# Altium PCB LOCK.PcbDoc
Units mm, origin at the board's own origin, x right, y up, seen from the top; angles counter-clockwise.
Board outline 115 x 40 mm, 2 copper layers (Top Layer, Bottom Layer); 90 components, 73 nets, 329 pads, 0 vias.
Unrouted connection lines stored in the file: 202.
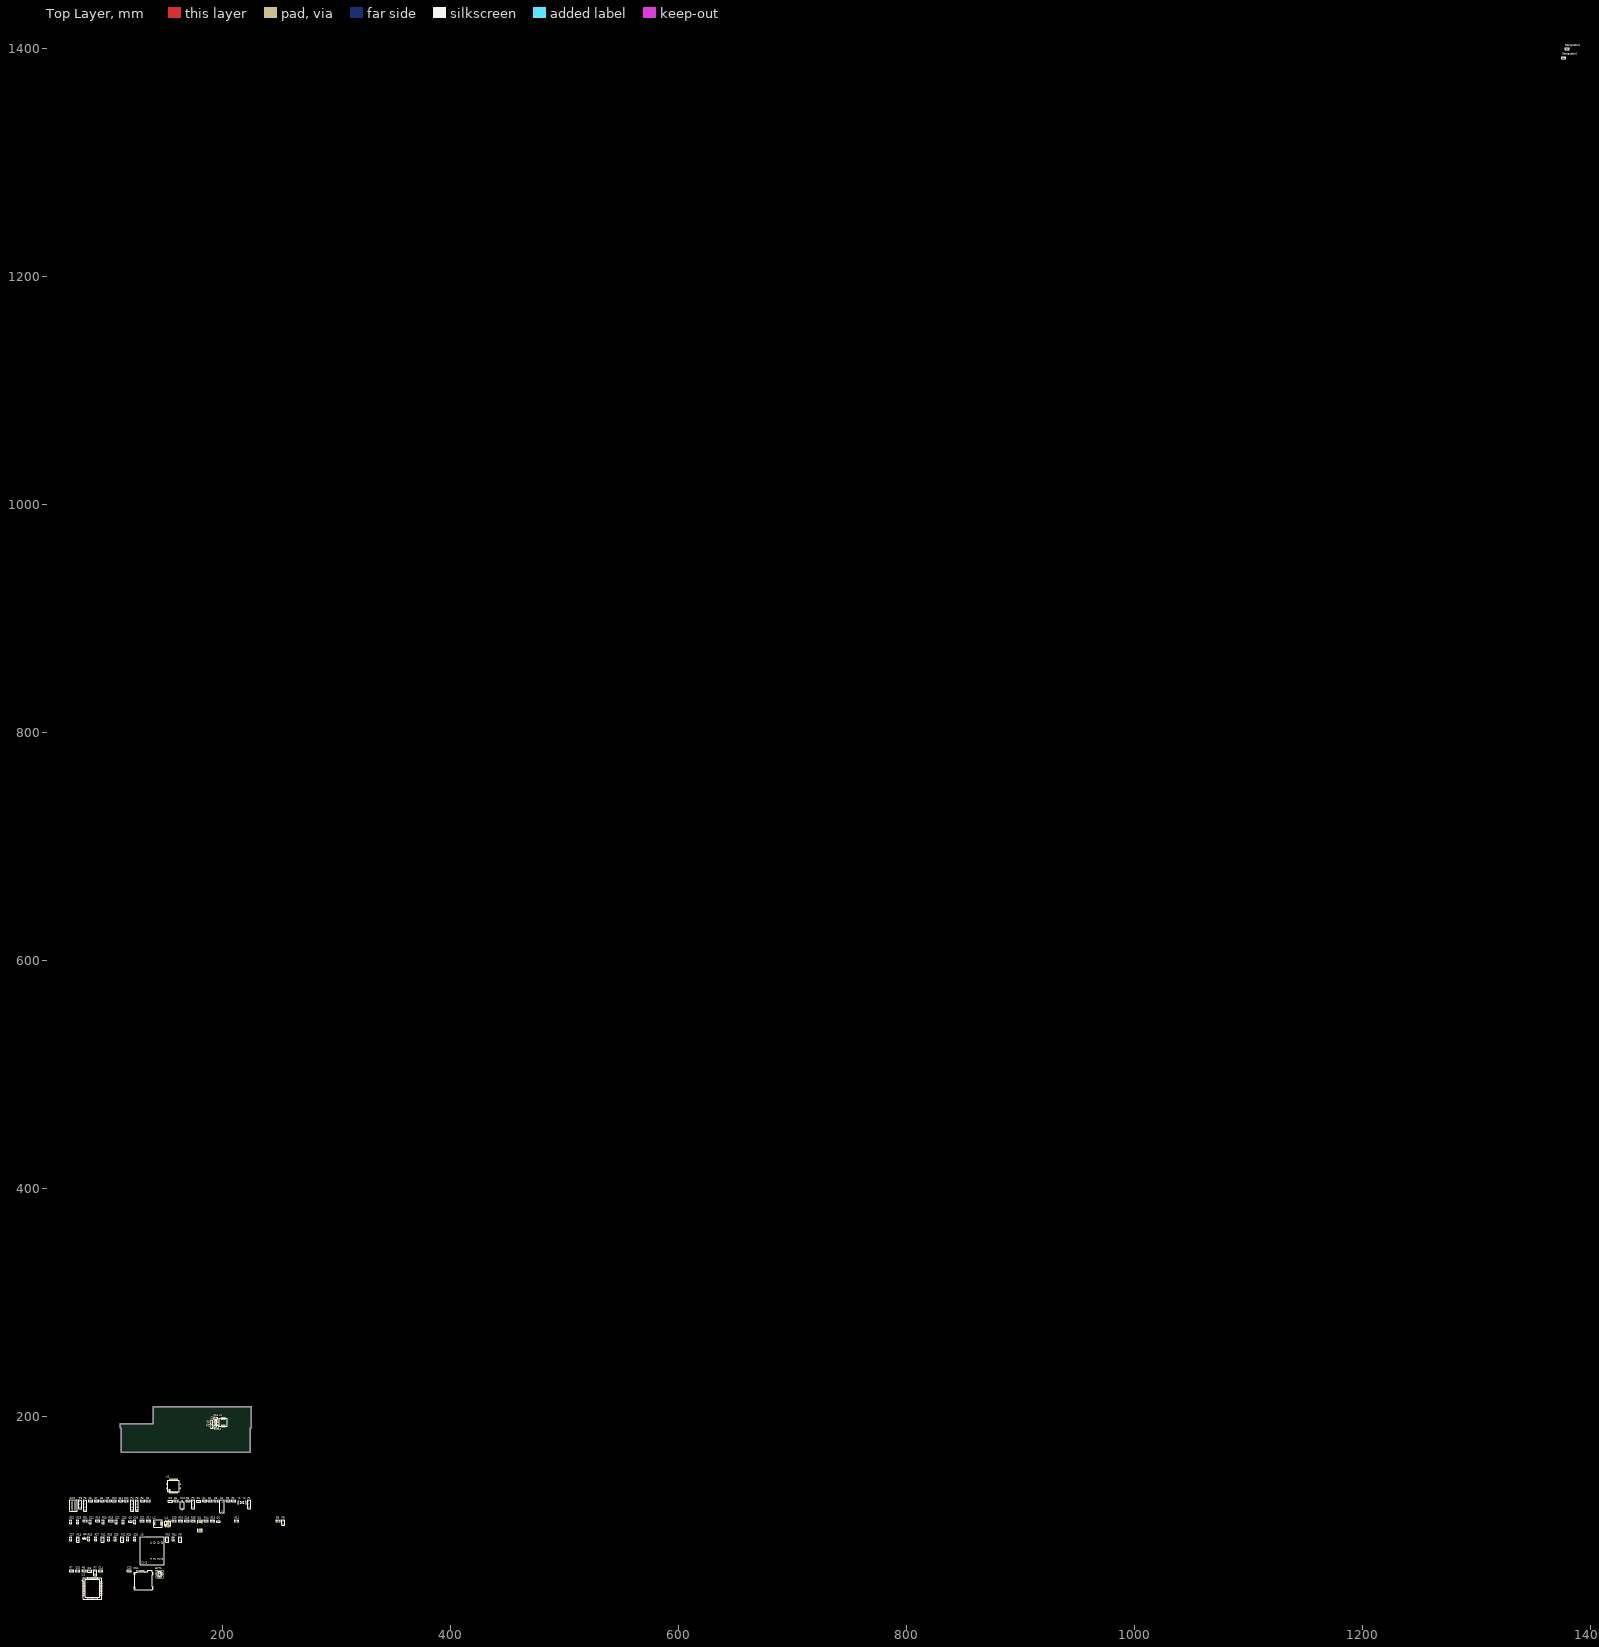
[diagram p0: Top Layer view]
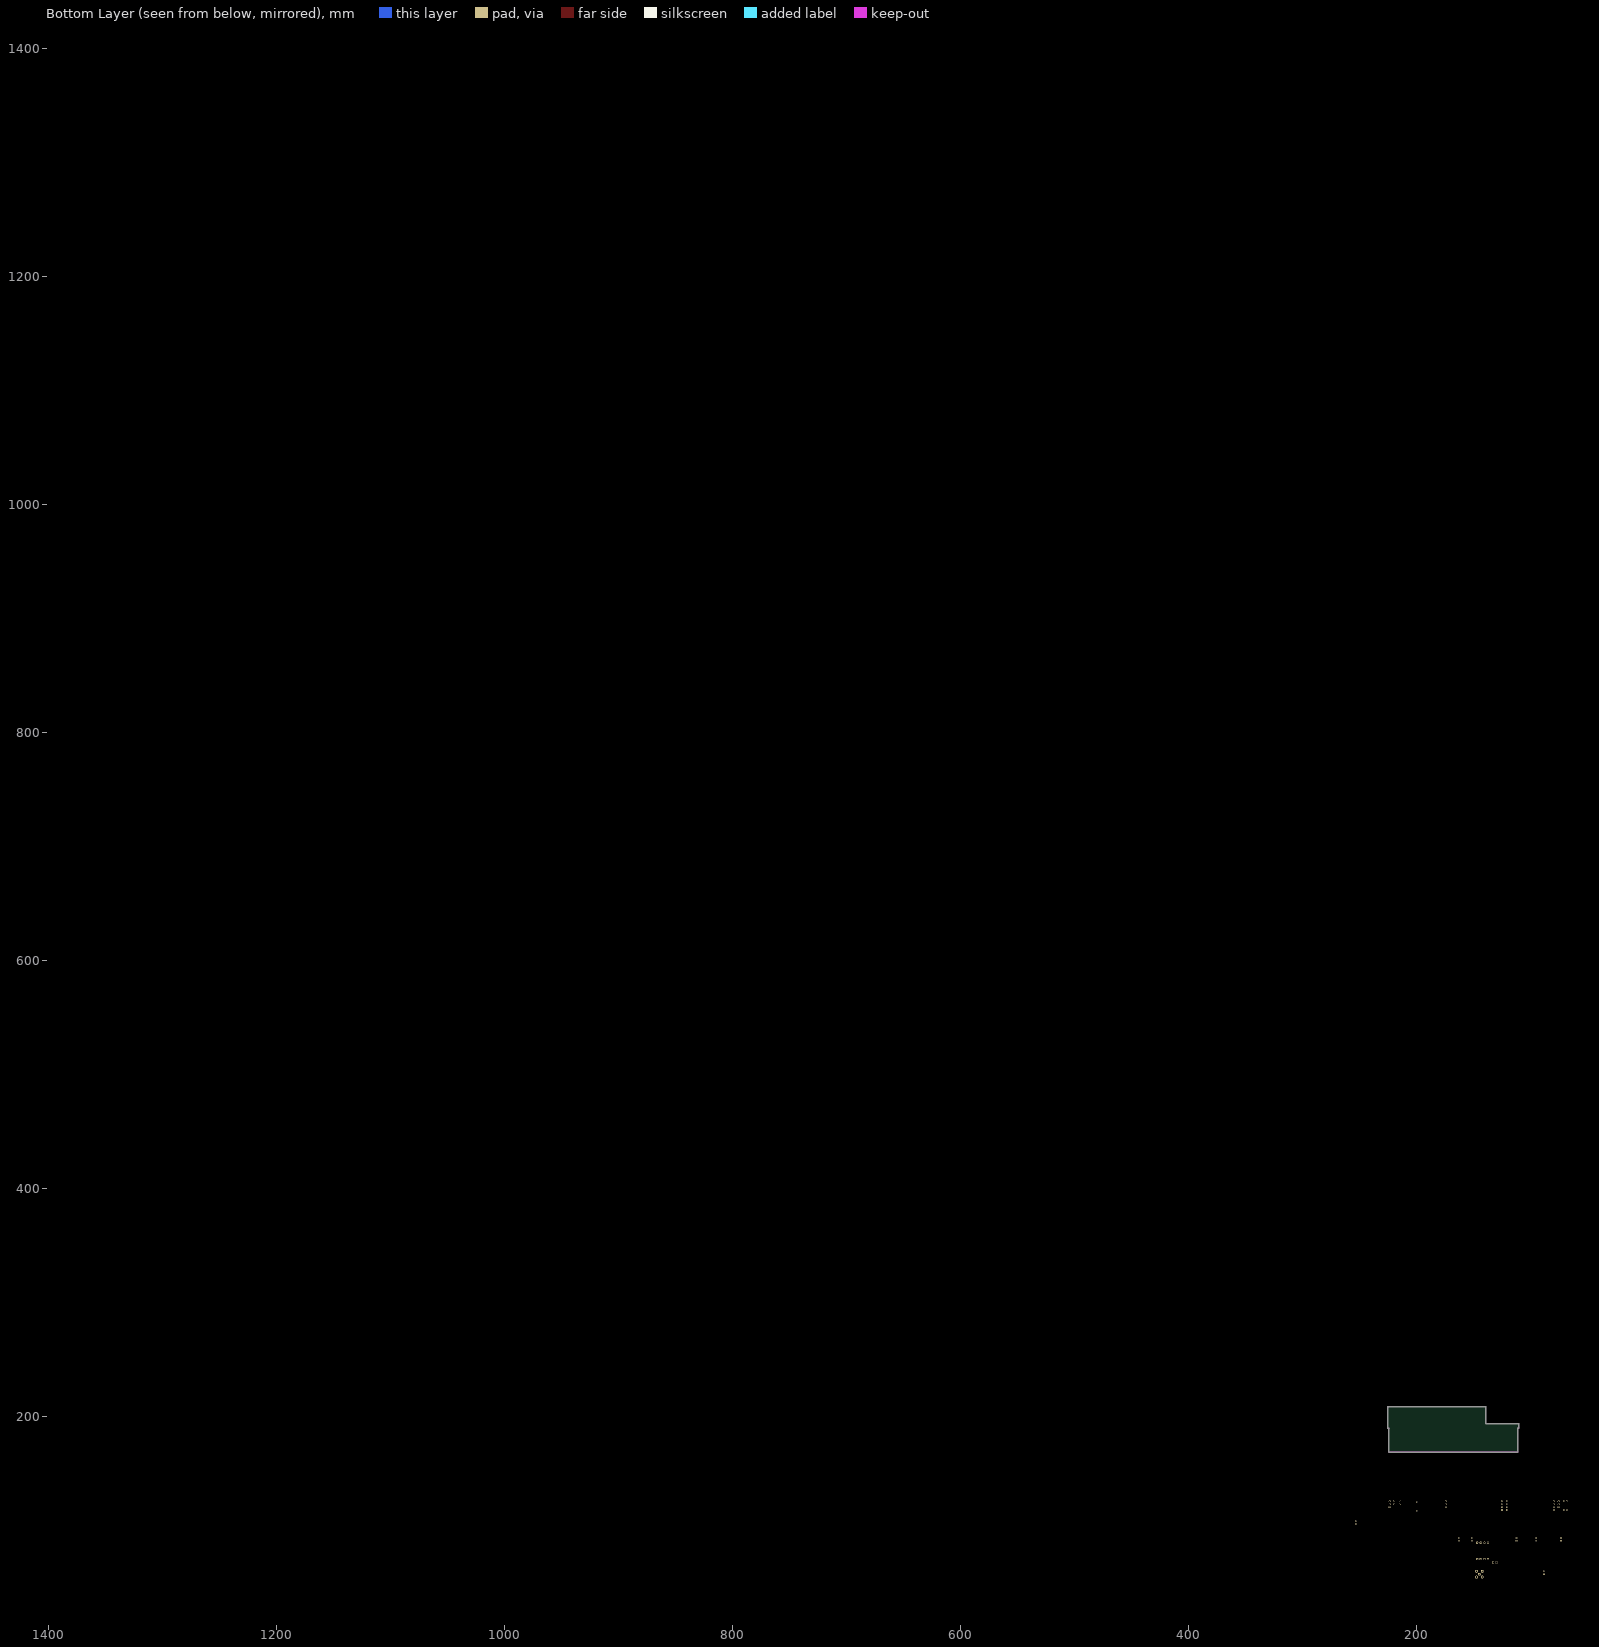
[diagram p1: Bottom Layer view, seen from below]

## Layer stack, top to bottom
Top Solder: solder mask 0.0102, Solder Resist, Dk 3.5
Top Layer: signal copper 0.0356
Dielectric 1: dielectric 0.32, FR-4, Dk 4.8
Bottom Layer: signal copper 0.0356
Bottom Solder: solder mask 0.0102, Solder Resist, Dk 3.5

## Board outline
111.191,189.347 ccw(c110.891,189.347) 110.891,189.647 110.491,189.647 cw(c110.491,189.947) 110.191,189.947 110.191,193.347 cw(c110.491,193.347) 110.491,193.647 138.891,193.647 ccw(c138.891,193.947) 139.191,193.947 139.191,208.347 cw(c139.491,208.347) 139.491,208.647 224.891,208.647 cw(c224.891,208.347) 225.191,208.347 225.191,189.947 cw(c224.891,189.947) 224.891,189.647 224.491,189.647 ccw(c224.491,189.347) 224.191,189.347 224.191,168.947 cw(c223.891,168.947) 223.891,168.647 111.491,168.647 cw(c111.491,168.947) 111.191,168.947

## Design rules (kind name [scope] priority, off if disabled: settings)
Clearance [All] p1: gap=0.2 ignorepadtopadclearanceinfootprint=FALSE
PolygonConnect [All] p1: connectstyle=Relief reliefconductorwidth=0.254 reliefentries=4 polygonreliefangle="90 Angle" airgapwidth=0.254
RoutingVias [All] p1: holewidth=0.711 width=1.27 viastyle="Through Hole" minholewidth=0.711 minwidth=1.27 maxholewidth=0.711 maxwidth=1.27
SilkToSilkClearance [All] p1: silktosilkclearance=0
SolderMaskExpansion [All] p1: expansion=0.102
Width [All] p1: maxlimit=0.254 minlimit=0.254 preferedwidth=0.254
29 further rules are at their usual default settings.

## Classes and differential pairs
component class GPRS: ANT1 C13 C14 C15 CN1 D3 P7 R6 R7 U2
component class U_DK_MOTO: C25 C26 C27 P9 P10 P11 P12 P13 Q3 R24 R25 R26 R27 R28 U5
component class U_DK_POWER: C16 C17 C18 C19 C20 C21 C22 C23 C24 D4 L1 L2 P8 Q1 Q2 R8 R9 R10 R11 R12 R13 R14 R15 R16 R17 R18 R19 R20 R21 R22 R23 U3 U4
component class U_DK_STM32L151: C1 C2 C3 C4 C5 C6 C7 C8 C9 C10 C11 C12 D1 D2 P1 P2 P3 P4 P5 P6 R1 R2 R3 R4 R5 SW1 SW2 U1 Y1 Y2

## Components (designator, comment, footprint, x,y, rotation, side; value= is the part's Value field where it differs from the comment)
ANT1 "SMB" SMB_V-RJ45 144.78,61.595 r0 top
C1 "Cap" 0603 -1016.508,-1071.372 r0 top value=22pF
C2 "Cap" 0603 -1011.428,-1071.372 r0 top value=22pF
C3 "Cap" 0603 -1006.348,-1071.372 r0 top value=10pF
C4 "Cap" RAD-0.3 199.644,121.031 r90 top value=10pF
C5 "Cap" 0603 -1041.4,-1071.372 r0 top value=0.1uF
C6 "Cap" 0603 -1116.33,-1071.372 r0 top value=100nF
C7 "Cap" 0603 -1111.25,-1071.372 r0 top value=100nF
C8 "Cap" 0603 -1106.17,-1071.372 r0 top value=100nF
C9 "Cap" 0603 -1101.09,-1071.372 r0 top value=100nF
C10 "Cap" 0603 -1096.01,-1071.372 r0 top value=10uF
C11 "Cap" 0603 -1090.295,-1071.372 r0 top value=100nF
C12 "NC" 0603 -1085.215,-1071.372 r0 top value=10uF
C13 "Cap2" 0603 -1082.548,-1132.713 r0 top value=100uF/6.6V
C14 "Cap" 0603 -1107.821,-1132.713 r0 top value=10uF
C15 "Cap" 0603 -1127.887,-1132.713 r0 top value=100nF
C16 "Cap" 0603 -1006.577,-998.982 r0 top value=4.7uF
C17 "Cap" 0603 1387.856,-1005.307 r90 top value=4.7uF
C18 "Cap" 0603 -1032.002,-1088.644 r0 top value=2.2uF
C19 "Cap" 0603 -1043.178,-1088.644 r0 top value=0.1uF
C20 "Cap" 0603 1320.292,-1093.216 r90 top value=10uF
C21 "Cap" 0603 -1071.118,-1088.644 r0 top value=10uF
C22 "Cap" 0603 1304.163,-1093.216 r90 top value=22uF
C23 "Cap" 0603 1310.005,-1093.216 r90 top value=22uF
C24 "Cap" 0603 1281.176,-1093.216 r90 top value=2.7nF
C25 "Cap" 0603 1320.038,-1108.075 r90 top value=0.1uF
C26 "Cap" 0603 1303.274,-1108.075 r90 top value=0.1uF
C27 "Cap" 0603 1264.158,-1108.075 r90 top value=0.1uF
CN1 "SIM_BLOCK" SIM_BLOCK 124.46,64.643 r0 top
D1 "LED0" LED0603 178.435,125.73 r0 top
D2 "LED0" LED0603 153.543,125.73 r0 top
D3 "LED GREEN" LED0603 82.804,64.389 r0 top
D4 "Diode" SMC 180.34,104.013 r90 top
Designator1 "Comment" 0603 178.689,202.438 r0 top
Designator2 "Comment" 0603 175.895,194.818 r0 top
L1 "Inductor" 0630 200.533,191.643 r90 top value=22uH
L2 "Inductor" 0630 140.081,106.045 r0 top value=4.7uH
P1 "BOOT0" HDR1X3 223.52,120.396 r90 top
P2 "BOOT1" HDR1X3 174.371,120.396 r90 top
P3 "SWD" HDR1X4 124.968,117.856 r90 top
P4 "UART1" HDR1X4 120.65,117.856 r90 top
P5 "UART3" HDR1X4 79.629,117.856 r90 top
P6 "Header 3" HDR1X3 75.311,120.396 r90 top
P7 "Header 2" HDR1X2 88.138,61.595 r90 top
P8 "BATT" HDR1X2 253.238,105.664 r90 top
P9 "MOTOR" HDR1X2 162.941,90.805 r90 top
P10 "L_OFF" HDR1X2 151.511,90.805 r90 top
P11 "L_ON" HDR1X2 112.141,90.805 r90 top
P12 "BELL" HDR1X2 94.869,90.805 r90 top
P13 "BUTTON" HDR1X2 73.152,90.805 r90 top
Q1 "MOSFET-N" sot-23 196.469,107.95 r0 top
Q2 "MOSFET-P" sot-23 119.126,107.95 r0 top
Q3 "NPN" SOT-23 78.994,93.091 r0 top
R1 "Res2" 0603 -990.854,-1071.372 r0 top value=10K
R2 "Res2" 0603 -995.934,-1071.372 r0 top value=1K
R3 "Res2" 0603 -1030.986,-1071.372 r0 top value=1K
R4 "Res2" 0603 -1065.911,-1071.372 r0 top value=3K
R5 "Res2" 0603 -1070.991,-1071.372 r0 top value=100R
R6 "Res2" 0603 -1122.299,-1132.713 r0 top value=1K
R7 "NC" 0603 -1132.967,-1132.713 r0 top value=0
R8 "Res2" 0603 -951.992,-1088.644 r0 top value="30K %1"
R9 "Res2" 0603 -1003.681,1391.895 r270 top value=300K
R10 "Res2" 0603 -1001.522,1391.895 r270 top value=100K
R11 "Res2" 0603 -988.314,-1088.644 r0 top value="10K %1"
R12 "Res2" 0603 -1006.602,1392.149 r270 top value=100K
R13 "Res2" 0603 -1009.523,-1088.644 r0 top value=1K
R14 "Res2" 0603 -1015.238,-1088.644 r0 top value=10K
R15 "NC" 0603 -1026.414,-1088.644 r0 top value=0
R16 "Res2" 0603 -1037.59,-1088.644 r0 top value=100K
R17 "NC" 0603 -1065.657,-1088.644 r0 top value=0
R18 "Res2" 0603 -1098.677,-1088.644 r0 top value="91K 1%"
R19 "Res2" 0603 -1110.107,-1088.644 r0 top value=10K
R20 "Res2" 0603 1292.733,-1093.216 r90 top value=137K
R21 "Res2" 0603 -1121.283,-1088.644 r0 top value=0
R22 "Res2" 0603 1264.158,-1093.216 r90 top value=13K
R23 "Res2" 0603 1270,-1093.216 r90 top value="24K 1%"
R24 "Res2" 0603 1353.947,-1108.075 r90 top value=10K
R25 "Res2" 0603 1314.196,-1108.075 r90 top value=10K
R26 "Res2" 0603 1297.432,-1108.075 r90 top value=0
R27 "Res2" 0603 1285.875,-1108.075 r90 top value=1K
R28 "Res2" 0603 1280.033,-1108.075 r90 top value=10K
SW1 "SW-PB" 3*6*4.3 164.592,122.174 r90 top
SW2 "SW DIP-2" SW-2*4 69.342,121.666 r0 top
U1 "STM32L151RCT6" LQFP64 156.984,138.973 r0 top
U2 "GU906" HFY_QFN_42_DTU 77.855,58.571 r0 top
U3 "TPS62120" TPS62120 192.833,195.92 r270 top
U4 "RT7272B" RT7272B 149.987,103.378 r0 top
U5 "MOTO" moto 148.717,69.85 r90 top
Y1 "8M" R38 214.757,124.46 r0 top
Y2 "32.768M" R38 219.329,124.46 r0 top

## Footprints (in the part's own frame and the unit in brackets; to place one, negate y for a bottom-side part, rotate by r counter-clockwise, add the part's x,y. Pads: shape width x height; smd on the part's side, far side on the other; paste and mask are expansions set on the pad)
3*6*4.3 [mm]
  rect 1.7x1.4 smd: 1(-3.65,0) 2(3.65,0)
  silkscreen extent -3.17,-1.91 3.17,1.91
0603 [mil]
  rect 38x30 smd: 1(47244,47135) 2(47306,47135)
  silkscreen extent 47205,47100 47345,47170
0630 [mm]
  rect 2.5x3.7 smd: 1(0,0) 2(6.5,0)
  silkscreen extent -0.41,-3.45 6.88,3.45
HDR1X2 [mm] "Connector; Header; 2 Position"
  rect 1.5x1.5 hole 0.9: 1(0,0)
  round 1.5 hole 0.9: 2(2.54,0)
  silkscreen extent -1.27,-1.27 3.81,1.27
HDR1X3 [mm] "Connector; Header; 3 Position"
  rect 1.5x1.5 hole 0.9: 1(0,0)
  round 1.5 hole 0.9: 2(2.54,0) 3(5.08,0)
  silkscreen extent -1.27,-1.27 6.35,1.27
HDR1X4 [mm] "Connector; Header; 4 Position"
  rect 1.5x1.5 hole 0.9: 1(0,0)
  round 1.5 hole 0.9: 2(2.54,0) 3(5.08,0) 4(7.62,0)
  silkscreen extent -1.27,-1.27 8.89,1.27
HFY_QFN_42_DTU [mm]
  oval 2x0.7 smd: 1(0.25,-3.459)
  rect 2x0.7 smd: 2(0.25,-4.559) 3(0.25,-5.659) 4(0.25,-6.759) 5(0.25,-7.859) 6(0.25,-8.959) 7(0.25,-10.059) 8(0.25,-11.159) 9(0.25,-12.259) 10(0.25,-13.359) 11(0.25,-14.459) 12(0.25,-15.559) 22(15.75,-15.559) 23(15.75,-14.459) 24(15.75,-13.359) 25(15.75,-12.259) 26(15.75,-11.159) 27(15.75,-10.059) 28(15.75,-8.959) 29(15.75,-7.859) 30(15.75,-6.759) 31(15.75,-5.659) 32(15.75,-4.559) 33(15.75,-3.459)
  rect 0.7x2 smd: 13(3.612,-18.75) 14(4.712,-18.75) 15(5.812,-18.75) 16(6.912,-18.75) 17(8.012,-18.75) 18(9.112,-18.75) 19(10.212,-18.75) 20(11.312,-18.75) 21(12.412,-18.75) 34(12.412,-0.25) 35(11.312,-0.25) 36(10.212,-0.25) 37(9.112,-0.25) 38(8.012,-0.25) 39(6.912,-0.25) 40(5.812,-0.25) 41(4.712,-0.25) 42(3.612,-0.25)
  silkscreen extent -1.42,-19.01 15.99,0
LED0603 [mil]
  rect 38x30 smd: 1(0,0) 2(62,0)
  silkscreen extent -39,-35 101,35
LQFP64 [mm]
  rect 0.3x1.4 smd: 1(-3.75,-5.75) 2(-3.25,-5.75) 3(-2.75,-5.75) 4(-2.25,-5.75) 5(-1.75,-5.75) 6(-1.25,-5.75) 7(-0.75,-5.75) 8(-0.25,-5.75) 9(0.25,-5.75) 10(0.75,-5.75) 11(1.25,-5.75) 12(1.75,-5.75) 13(2.25,-5.75) 14(2.75,-5.75) 15(3.25,-5.75) 16(3.75,-5.75) 33(3.75,5.75) 34(3.25,5.75) 35(2.75,5.75) 36(2.25,5.75) 37(1.75,5.75) 38(1.25,5.75) 39(0.75,5.75) 40(0.25,5.75) 41(-0.25,5.75) 42(-0.75,5.75) 43(-1.25,5.75) 44(-1.75,5.75) 45(-2.25,5.75) 46(-2.75,5.75) 47(-3.25,5.75) 48(-3.75,5.75)
  rect 1.4x0.3 smd: 17(5.75,-3.75) 18(5.75,-3.25) 19(5.75,-2.75) 20(5.75,-2.25) 21(5.75,-1.75) 22(5.75,-1.25) 23(5.75,-0.75) 24(5.75,-0.25) 25(5.75,0.25) 26(5.75,0.75) 27(5.75,1.25) 28(5.75,1.75) 29(5.75,2.25) 30(5.75,2.75) 31(5.75,3.25) 32(5.75,3.75) 49(-5.75,3.75) 50(-5.75,3.25) 51(-5.75,2.75) 52(-5.75,2.25) 53(-5.75,1.75) 54(-5.75,1.25) 55(-5.75,0.75) 56(-5.75,0.25) 57(-5.75,-0.25) 58(-5.75,-0.75) 59(-5.75,-1.25) 60(-5.75,-1.75) 61(-5.75,-2.25) 62(-5.75,-2.75) 63(-5.75,-3.25) 64(-5.75,-3.75)
  silkscreen extent -5.21,-5.21 5.21,5.21
moto [mm]
  round 2 hole 1.4: 1(2,19) 2(5,11.5) 3(5,8.5) 4(5,5) 5(5,2) 6(19.3,2) 7(19.3,5) 8(19.3,8.5) 9(19.3,11.5) 10(2,16)
  silkscreen extent 0,0 24.7,21
R38 [mm] "Crystal, Thru-Hole; 2 Leads; Body 3.1 x 8.2 mm (Dia.xH)"
  round 1.3 hole 0.7: 1(0,1.55) 2(0,-1.55)
  silkscreen extent -1.55,-1.19 1.55,1.17
RAD-0.3 [mm] "Radial Cap, Thru-Hole; 2 Leads; 0.3 in Pin Spacing"
  round 1.2 hole 0.7: 1(-3.81,0) 2(3.81,0)
  silkscreen extent -5.71,-1.91 5.71,1.91
RT7272B [mm]
  rect 0.5x1.4 smd: 1(0,0) 2(1.27,0) 3(2.54,0) 4(3.81,0) 5(3.81,5.3) 6(2.54,5.3) 7(1.27,5.3) 8(0,5.304)
  rect 2.7x2.5 smd: 9(1.905,2.65)
  silkscreen extent -0.64,0.74 4.44,4.55
SIM_BLOCK [mm]
  rect 1x1.35 smd: C1(1.27,0) C2(3.81,0) C3(6.35,0) C5(0,0) C6(2.54,0) C7(5.08,0)
  rect 1.6x2.65 smd: C4(-1.575,-2.413) C8(-1.575,-15.113) C9(14.249,-15.113) C10(14.249,-2.413)
  silkscreen extent -1.79,-16.87 14.39,0.41
SMB_V-RJ45 [mm] "Connector; SMB Straight"
  round 2.5 hole 1.5: 1(0,0) 2(-2.5,-2.5) 2(-2.5,2.5) 2(2.5,-2.5) 2(2.5,2.5)
  silkscreen extent -3.15,-3.15 3.15,3.15
SMC [mm] "DO-214-AB/SMC; 2 C-Bend Leads; Body 7.9 x 5.9 mm, inc. leads (LxW)"
  rect 2.4x3.3 smd: 1(-3.475,0) 2(3.475,0)
  silkscreen extent -5.07,-2.05 5.43,2.05
sot-23 [mm]
  rect 0.9x0.9 smd: 1(-0.95,-1.01) 2(0.95,-1.01) 3(0,1.01)
  silkscreen extent -1.52,-0.64 1.52,0.64
SOT-23 [mm]
  rect 0.9x0.9 smd: 1(-0.95,-1.01) 2(0.95,-1.01) 3(0,1.01)
  silkscreen extent -1.52,-0.64 1.52,0.64
SW-2*4 [mm]
  round 1.5 hole 1: 1(-1.27,-3.81) 2(1.27,-3.81) 3(1.27,3.81) 4(-1.27,3.81)
  silkscreen extent -3.3,-4.95 3.3,5.08
TPS62120 [mm]
  rect 0.45x1.4 smd: 1(0,0) 2(0.65,0) 3(1.3,0) 4(1.95,0) 5(1.95,2.7) 6(1.3,2.7) 7(0.65,2.7) 8(0,2.7)
  rect 2x0.9 smd: 9(0.975,1.35)
  silkscreen extent -0.55,0.76 2.5,2.03

## Part data
ANT1: "SMB Straight Connector", LatestRevisionDate=17-Jul-2002, LatestRevisionNote="Re-released for DXP Platform.", Publisher="Altium Limited"
C1 C2 C3 C4 C5 C6 C7 C8 C9 C10 C11 C13 C14 C15 C16 C17 C18 C19 C20 C21 C22 C23 C24 C25 C26 C27: "Capacitor", Publisher="Altium Limited"
  C1 C2 C3 C4 C5 C6 C7 C8 C9 C10 C11 C14 C15 C16 C17 C18 C19 C20 C21 C22 C23 C24 C25 C26 C27: LatestRevisionDate=17-Jul-2002, LatestRevisionNote="Re-released for DXP Platform.", PackageDescription="Radial Cap, Thru-Hole; 2 Leads; 0.3 in Pin Spacing", PackageReference=RAD-0.3, Published=8-Jun-2000
  C13: PackageDescription="Capacitor; 2 Leads", PackageReference=CAPR5-4X5, Published=23-Sep-2002
C12: library part Cap, "Capacitor", LatestRevisionDate=17-Jul-2002, LatestRevisionNote="Re-released for DXP Platform.", PackageDescription="Radial Cap, Thru-Hole; 2 Leads; 0.3 in Pin Spacing", PackageReference=RAD-0.3, Published=8-Jun-2000, Publisher="Altium Limited"
CN1: library part SIM_BLOCK_2
D1 D2: "Typical INFRARED GaAs LED", LatestRevisionDate=08-Jul-2005, LatestRevisionNote="Mech Layer 1 removed.", PackageDescription="LED; 2 Leads", PackageReference=LED-0, Published=8-Jun-2000, Publisher="Altium Limited"
D3: library part LED2, "Typical RED, GREEN, YELLOW, AMBER GaAs LED", LatestRevisionDate=17-Jul-2002, LatestRevisionNote="Re-released for DXP Platform.", PackageDescription="SM LED; 2 Flat Leads", PackageReference=3.2X1.6X1.1, PackageVersion=Feb-2002, Published=8-Jun-2000, Publisher="Altium Limited"
D4: "Default Diode", Code_JEDEC=DO-214-AB, LatestRevisionDate=17-Jul-2002, LatestRevisionNote="Re-released for DXP Platform.", PackageDescription="DO-214-AB/SMC; 2 C-Bend Leads; Body 7.9 x 5.9 mm, inc. leads (LxW)", PackageReference=SMC, PackageVersion=Sep-1996, Published=8-Jun-2000, Publisher="Altium Limited"
P1 P2: library part "Header 3", "Header, 3-Pin", LatestRevisionDate=17-Jul-2002, LatestRevisionNote="Re-released for DXP Platform.", Publisher="Altium Limited"
P3 P4 P5: library part "Header 4", "Header, 4-Pin", LatestRevisionDate=17-Jul-2002, LatestRevisionNote="Re-released for DXP Platform.", Publisher="Altium Limited"
P6: "Header, 3-Pin", LatestRevisionDate=17-Jul-2002, LatestRevisionNote="Re-released for DXP Platform.", Publisher="Altium Limited"
P7: "Header, 2-Pin", LatestRevisionDate=17-Jul-2002, LatestRevisionNote="Re-released for DXP Platform.", Publisher="Altium Limited"
P8 P9 P10 P11 P12 P13: library part "Header 2", "Header, 2-Pin", LatestRevisionDate=17-Jul-2002, LatestRevisionNote="Re-released for DXP Platform.", Publisher="Altium Limited"
Q1: library part NMOS-2, "N-Channel Power MOSFET", ComponentLink1Description="Manufacturer Link", ComponentLink1URL=http://www.irf.com/, DatasheetVersion=PD-9.814, LatestRevisionDate=17-Jul-2002, LatestRevisionNote="Re-released for DXP Platform.", Note="Pin 2 is electrically connected to pin 4.", PackageDescription="TO, Thru-Hole, Vertical, Heatsink Mounted; 3 In-Line Leads; Pitch 2.54 mm", PackageReference=TO-220AB, PackageVersion=Feb-1997, Published=8-Jun-2000, Publisher="Altium Limited"
Q2: library part PMOS-2, "P-Channel Power MOSFET", ComponentLink1Description="Manufacturer Link", ComponentLink1URL=http://www.irf.com/, DatasheetVersion=PD-9.390D, LatestRevisionDate=17-Jul-2002, LatestRevisionNote="Re-released for DXP Platform.", Note="Pin 4 not drawn and electrically connected to Pin 2.", PackageDescription="TO, Thru-Hole, Vertical, Heatsink Mounted; 3 In-Line Leads; Pitch 2.54 mm", PackageReference=TO-220AB, PackageVersion=Feb-1997, Published=8-Jun-2000, Publisher="Altium Limited"
Q3: "NPN Bipolar Transistor", Code_JEDEC=TO-226-AA, LatestRevisionDate=17-Jul-2002, LatestRevisionNote="Re-released for DXP Platform.", PackageDescription="TO, Flat Index; 3 In-Line, Axial Leads; Body Dia. 4.8mm; Leads 0.55 x 0.51 mm (max)", PackageReference=TO-226-AA, Published=8-Jun-2000, Publisher="Altium Limited"
R1 R2 R3 R4 R5 R6 R8 R9 R10 R11 R12 R13 R14 R16 R18 R19 R20 R21 R22 R23 R24 R25 R26 R27 R28: "Resistor", LatestRevisionDate=17-Jul-2002, LatestRevisionNote="Re-released for DXP Platform.", PackageDescription="Axial Device, Thru-Hole; 2 Leads; 0.4 in Pin Spacing", PackageReference=AXIAL-0.4, Published=8-Jun-2000, Publisher="Altium Limited"
R7 R15 R17: library part Res2, "Resistor", LatestRevisionDate=17-Jul-2002, LatestRevisionNote="Re-released for DXP Platform.", PackageDescription="Axial Device, Thru-Hole; 2 Leads; 0.4 in Pin Spacing", PackageReference=AXIAL-0.4, Published=8-Jun-2000, Publisher="Altium Limited"
SW1: "Switch", LatestRevisionDate=17-Jul-2002, LatestRevisionNote="Re-released for DXP Platform.", PackageDescription="Switch; 2 Leads", PackageReference=SPST-2, Published=24-Mar-1999, Publisher="Altium Limited"
SW2: "DIP Switch, 2 Position, SPST", LatestRevisionDate=17-Jul-2002, LatestRevisionNote="Re-released for DXP Platform.", PackageReference=DIP-4, Published=24-Mar-1999, Publisher="Altium Limited"
U1: "ARM Cortex-M3 32-bit MCU, 256 KB Flash, 32 KB Internal RAM, 51 I/Os, 64-pin LQFP, -40 to 85 degC, Tray", I/Os (High Current)=51, Manufacturer=STMicroelectronics, Operating Frequency(F) (Processor speed) (MHz)=32, Supply Voltage(Vcc) min (V)=1.65, ComponentLink1Description="Manufacturer URL", ComponentLink1URL=http://www.st.com/web/en/home.html, ComponentLink2Description=Datasheet, ComponentLink2URL=http://www.st.com/st-web-ui/static/active/en/resource/technical/document/datasheet/DM00048356.pdf, ComponentLink3Description="Package Specification", ComponentLink3URL=http://www.st.com/st-web-ui/static/active/en/resource/technical/document/datasheet/DM00037051.pdf, Core="ARM Cortex-M3", D/A Converter="2x12-bit (2 Channel)", Data E2PROM nom (B)=8192, DatasheetVersion="Rev. 3", FLASH Size (Prog) (kB)=256, Internal RAM Size (kB)=32, Mounting Technology="Surface Mount", PackageDescription="64-Pin Low Profile Quad Flat Package, 10 x 10 mm Body, 0.5 mm Pitch", PackageReference=LQFP64, PackageVersion="Rev. 4, 06/2013", Packing=Tray, PartNumber=STM32L151RCT6
U2: library part GU600_LIB_2
Y1 Y2: library part XTAL, "Crystal Oscillator", LatestRevisionDate=17-Jul-2002, LatestRevisionNote="Re-released for DXP Platform.", PackageDescription="Crystal, Thru-Hole; 2 Leads; Body 3.1 x 8.2 mm (Dia.xH)", PackageReference=R38, Published=8-Jun-2000, Publisher="Altium Limited"
L1 L2: Code_IEC=1005, Code_JEITA=0402, LatestRevisionDate=29-May-2009, LatestRevisionNote="IPC-7351 Footprint Added.", PackageDescription="Chip Inductor", PackageReference=0402-A, Published=8-Jun-2000, Publisher="Altium Limited"

## Nets (pads, with @x,y where several pads share a name; then routed paths per layer and width w, separated by ;. In a path a pad name is that pad's centre, name@x,y a point inside that pad or via, vN(x,y) a via of type N, cw(c..) or ccw(c..) an arc to the next point about the centre after c; other vN are vias at no path point)
BATT: C17.2 C20.2 C21.2 D4.1 P8.1 R8.2 R17.2 R26.2 U3.1 U3.3 U4.8 U5.1
BOOT0: P1.2 U1.60
BOOT1: P2.2 U1.28
GND: ANT1.2 C1.1 C2.1 C3.1 C4.1 C5.2 C13.2 C14.1 C15.1 C16.1 C17.1 C20.1 C21.1 C22.1 C23.1 C25.1 C26.1 C27.1 CN1.C4 CN1.C5 CN1.C8 CN1.C9 CN1.C10 P1.3 P2.3 P3.4 P4.4 P5.4 P8.2 P10.2 P11.2 P13.2 Q1.3 Q3.3 R6.2 R11.2 R12.1 R19.1 R20.1 R22.1 R23.1 SW1.2 U1.12 U1.18 U1.31 U1.47 U1.63 U2.5 U2.26 U2.28 U2.36 U2.37 U2.39 U2.40 U3.2 U3.9 U4.4 U5.10
GPRS_PWR: R13.2 R21.1 U1.22
GPRS_RX2: P7.2 U2.29
GPRS_TX2: P7.1 U2.30
GSM_GPRS: C15.2 D3.1 U2.18
L_OFF: C25.2 P10.1 R24.1 U1.57
L_ON: C26.2 P11.1 R25.1 U1.56
LED0: D1.2 U1.61
LED1: D2.2 U1.62
MCU_RX1: P4.1 U1.43
MCU_TX1: P4.2 U1.42
MOTO1: U1.35 U5.2
MOTO2: U1.36 U5.3
MOTOR1: P9.1 U5.9
MOTOR2: P9.2 U5.8
NetANT1_1: ANT1.1 U2.38
NetC6_1: C6.1 C7.1 C8.1 C9.1 C10.1 C11.1 C12.1
NetC18_1: C18.1 C22.2 C23.2 L2.2 Q2.3 R15.1 R16.1 R18.2
NetC18_2: C18.2 Q2.1 R14.1 R16.2
NetC19_1: C19.1 L2.1 U4.1
NetC19_2: C19.2 D4.2 U4.2
NetC24_1: C24.1 U4.6
NetC24_2: C24.2 R22.2
NetD1_1: D1.1 R2.1
NetD2_1: D2.1 R3.1
NetD3_2: D3.2 R6.1
NetL1_1: L1.1 U3.7
NetP12_1: P12.1 R26.1
NetP12_2: P12.2 Q3.1
NetQ1_1: Q1.1 R13.1
NetQ1_2: Q1.2 R14.2
NetQ3_2: Q3.2 R27.2
NetR4_1: R4.1 U2.31
NetR4_2: R4.2 U1.16
NetR5_1: R5.1 U2.32
NetR5_2: R5.2 U1.17
NetR7_1: R7.1 U2.20
NetR7_2: R7.2 U1.49
NetR8_1: R8.1 R11.1 U1.24
NetR9_1: R9.1 R12.2 U3.5
NetR10_1: R10.1 U3.6
NetR17_1: R17.1 R19.2 R21.2 U4.3
NetR18_1: R18.1 R23.2 U4.5
NetR20_2: R20.2 U4.7
NetR27_1: R27.1 U1.30
OCS32_IN: C3.2 Y2.1
OCS32_OUT: U1.4
OCS_OUT: U1.6
OSC32_IN: U1.3
OSC32_OUT: C4.2 Y2.2
OSC_IN: C1.2 U1.5 Y1.1
OSC_OUT: C2.2 Y1.2
PA0: P6.3 U1.14
PA13: P6.2 U1.46
PC0: P6.1 U1.8
PC1: SW2.4 U1.9
PC2: SW2.3 U1.10
PWON: U1.23 U2.33
RESET: C5.1 R1.2 SW1.1 U1.7
RX3: P5.2 U1.52
SIM_CLK: CN1.C3 U2.9
SIM_DATA: CN1.C7 U2.10
SIM_RST: CN1.C2 U2.8
SIM_VCC: C14.2 CN1.C1 CN1.C6 U2.7
SW1: C27.2 P13.1 R28.1 U1.58
SWCLK: P3.1
SWDIO: P3.2
TX3: P5.1 U1.51
V3.3: C6.2 C7.2 C8.2 C9.2 C10.2 C11.2 C12.2 C16.2 L1.2 P1.1 P2.1 P3.3 P4.3 P5.3 R1.1 R2.2 R3.2 R9.2 R10.2 R24.2 R25.2 R28.2 SW2.1 SW2.2 U1.13 U1.19 U1.32 U1.48 U1.64 U3.4 U3.8
V3.8: C13.1 Q2.2 R15.2 U2.34 U2.35
pads on no net: Designator1.1 Designator1.2 Designator2.1 Designator2.2 U1.1 U1.2 U1.11 U1.15 U1.20 U1.21 U1.25 U1.26 U1.27 U1.29 U1.33 U1.34 U1.37 U1.38 U1.39 U1.40 U1.41 U1.44 U1.45 U1.50 U1.53 U1.54 U1.55 U1.59 U2.1 U2.2 U2.3 U2.4 U2.6 U2.11 U2.12 U2.13 U2.14 U2.15 U2.16 U2.17 U2.19 U2.21 U2.22 U2.23 U2.24 U2.25 U2.27 U2.41 U2.42 U4.9 U5.4 U5.5 U5.6 U5.7

## Keep-outs
Keep-Out Layer:
  the board outline again, w0.013